# Altium PCB PCB_DataAcq.PcbDoc (part 1 of 2)
Units mm, origin at the board's own origin, x right, y up, seen from the top; angles counter-clockwise.
Board outline 85 x 89.03 mm, 4 copper layers (Top Layer, Top Ground, Bottom Ground, Bottom Layer), stack 1.58 mm thick; 137 components, 89 nets, 495 pads, 1207 vias.
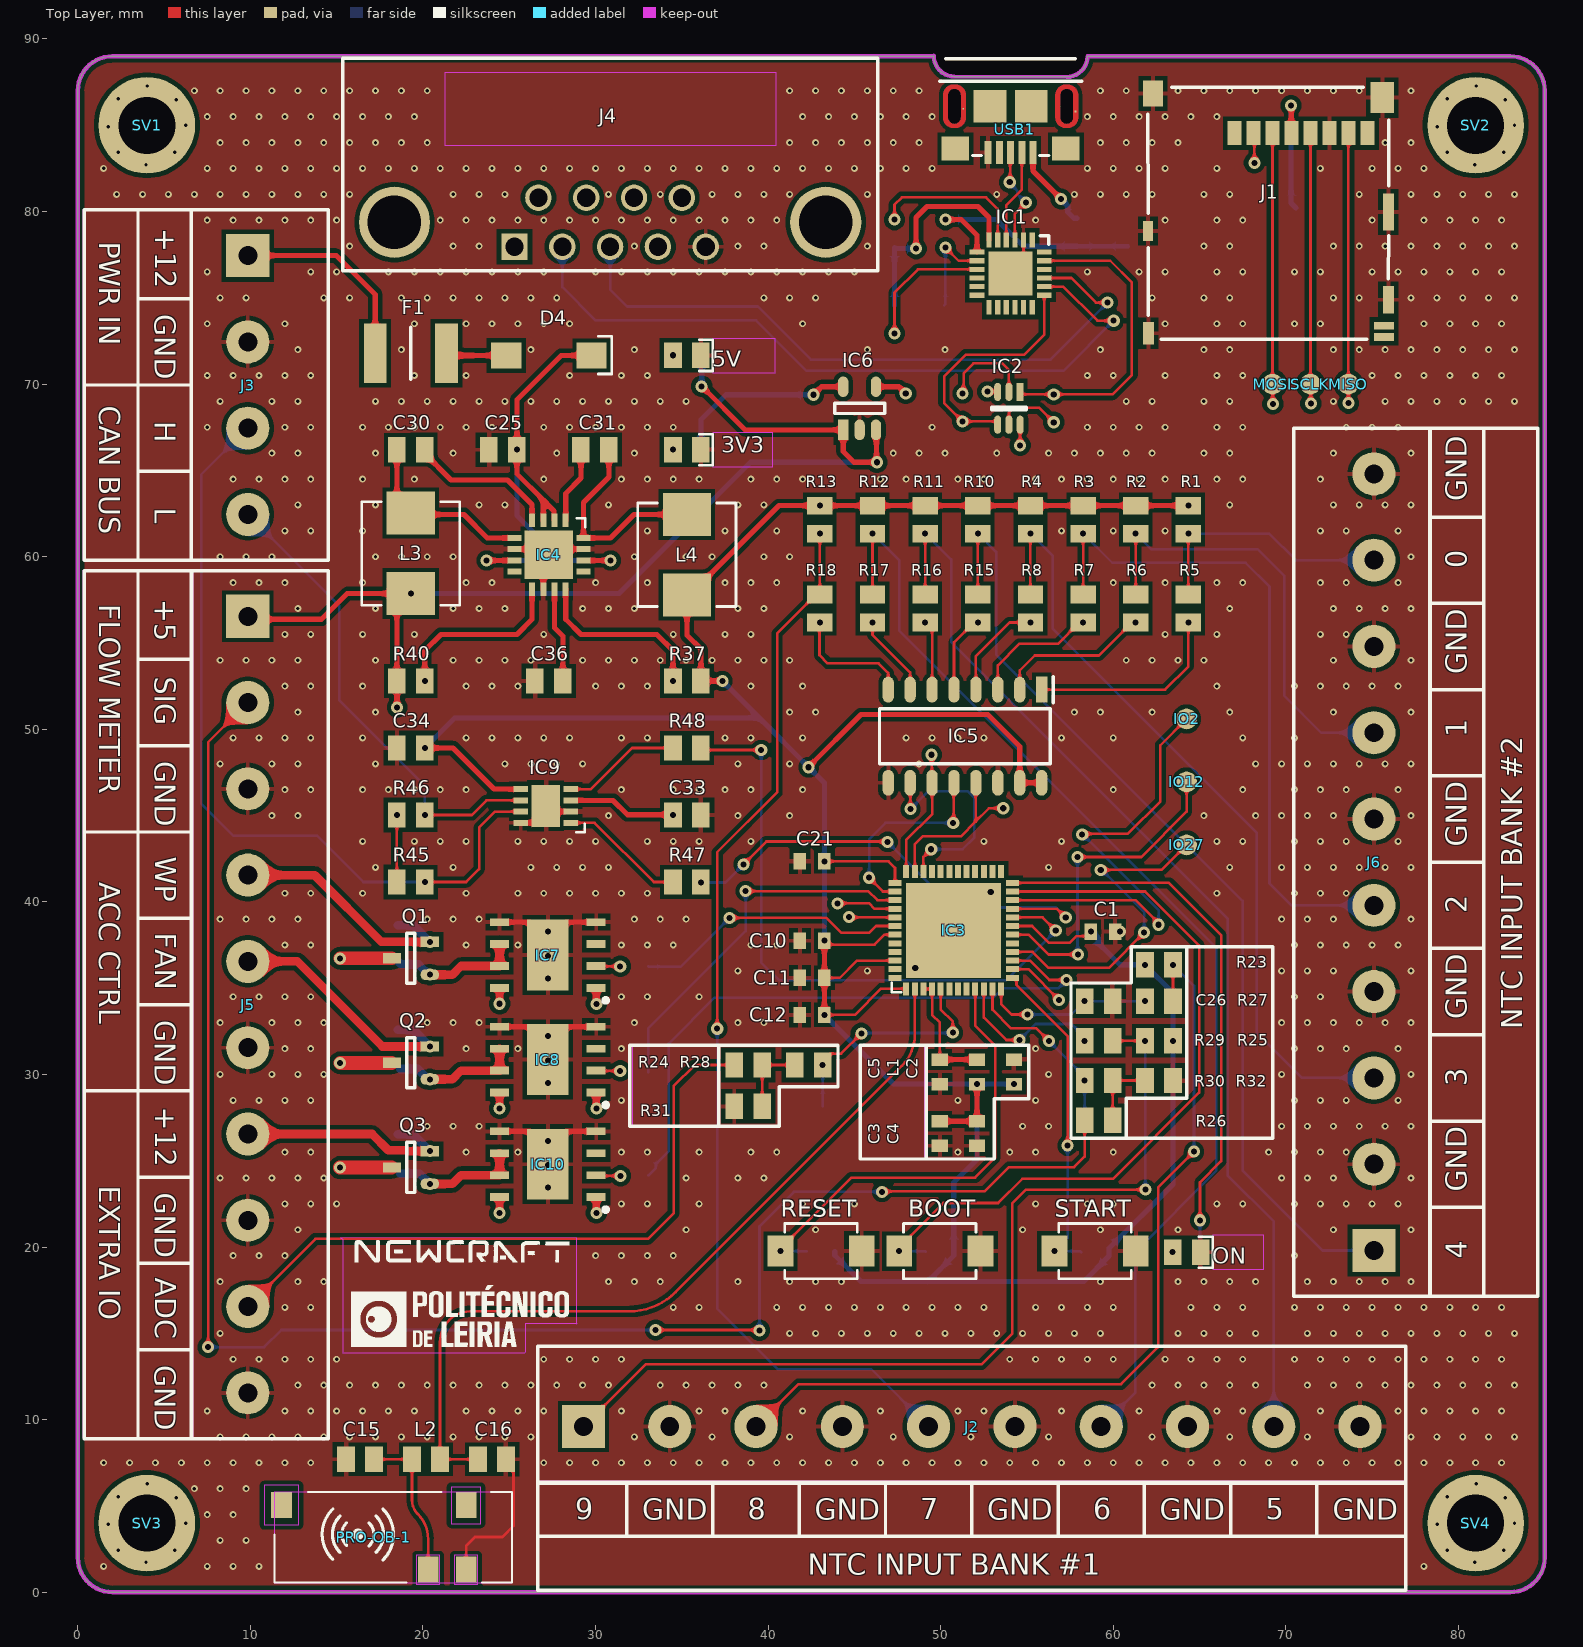
[diagram p0: Top Layer view]
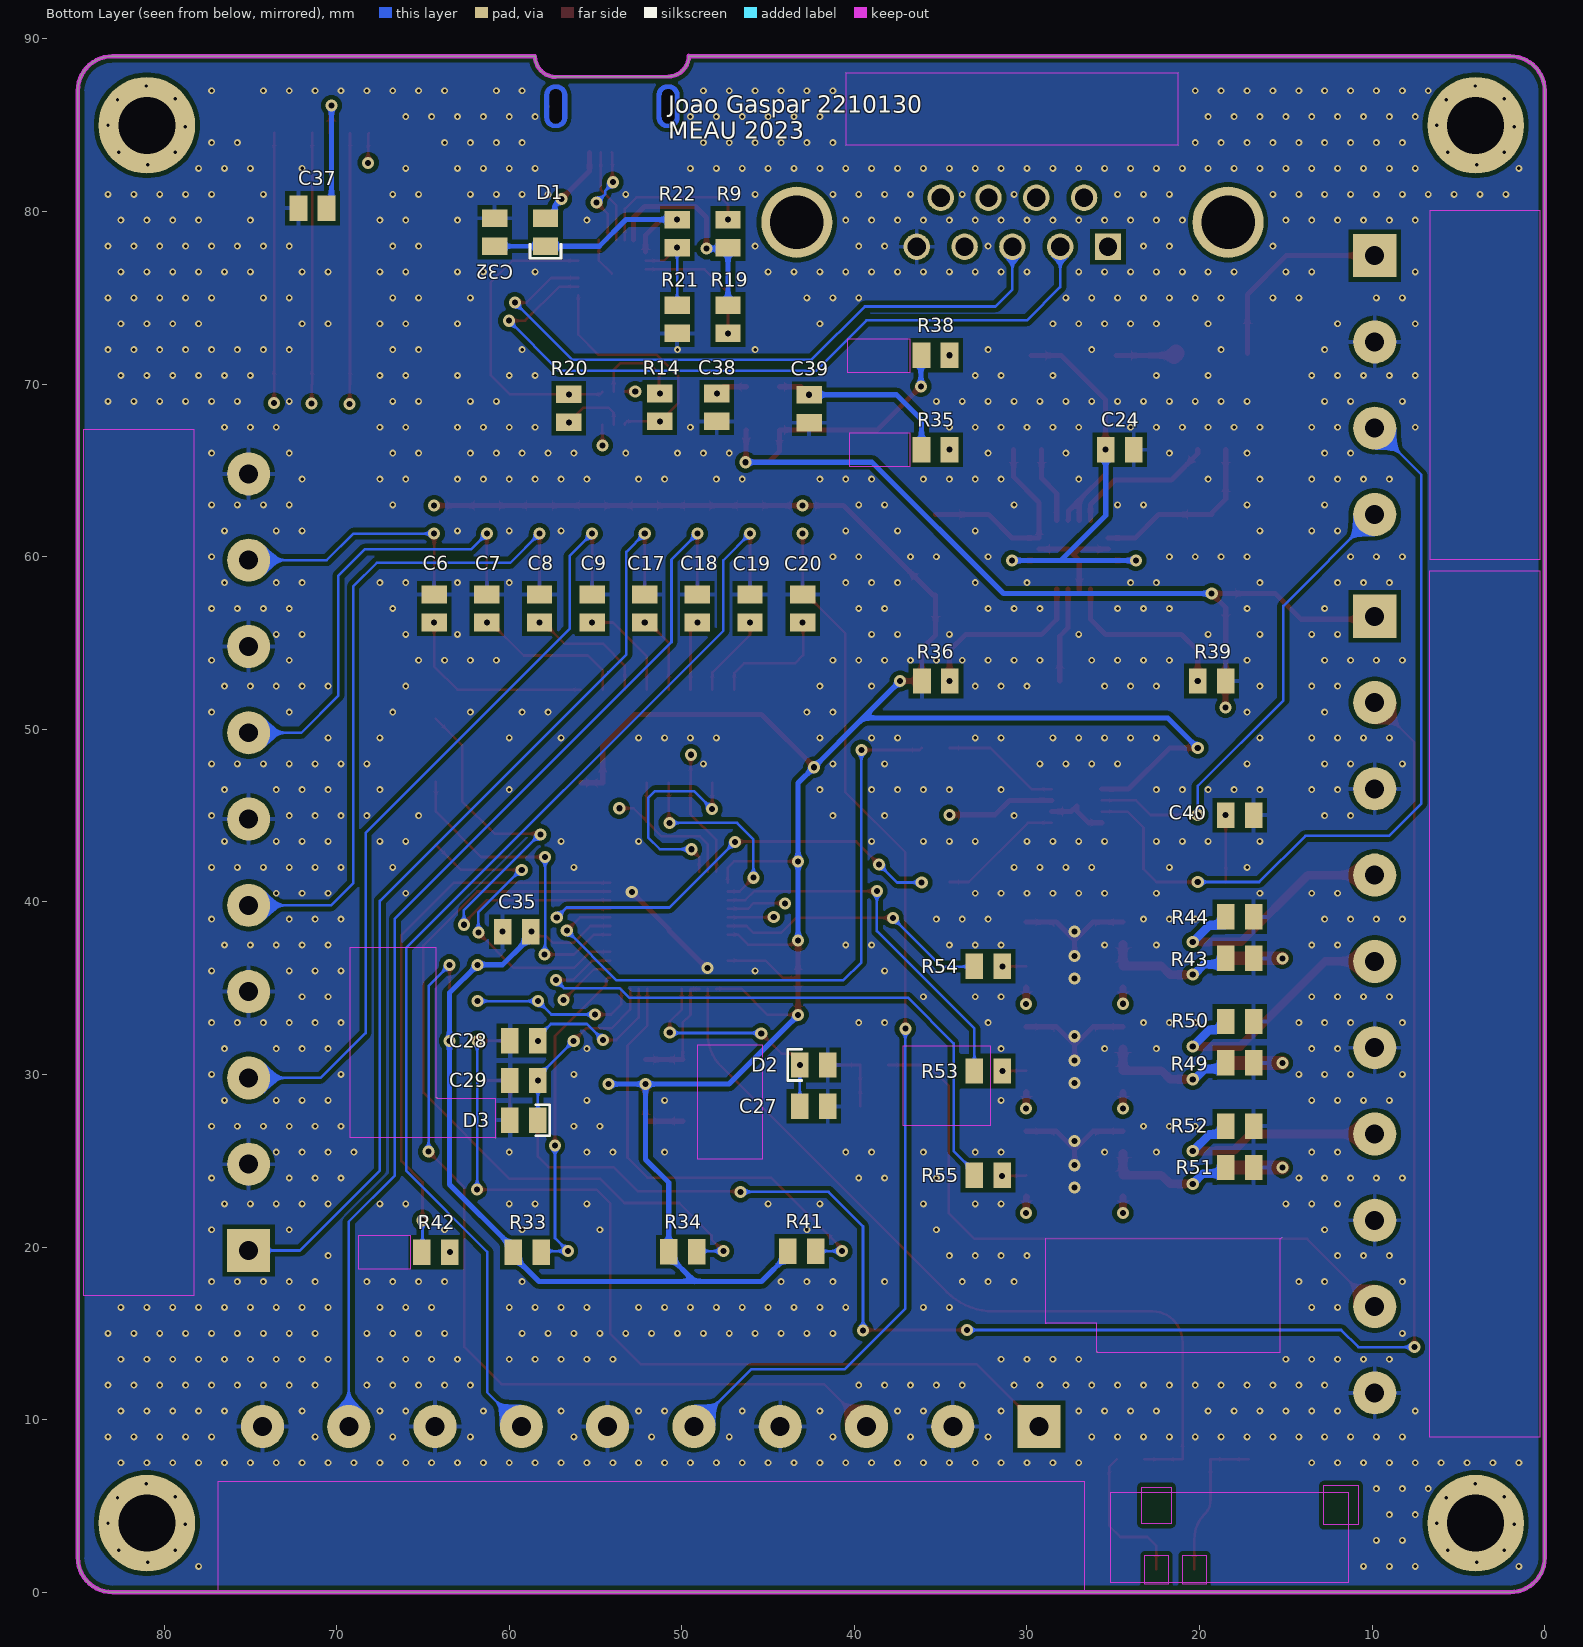
[diagram p1: Bottom Layer view, seen from below]
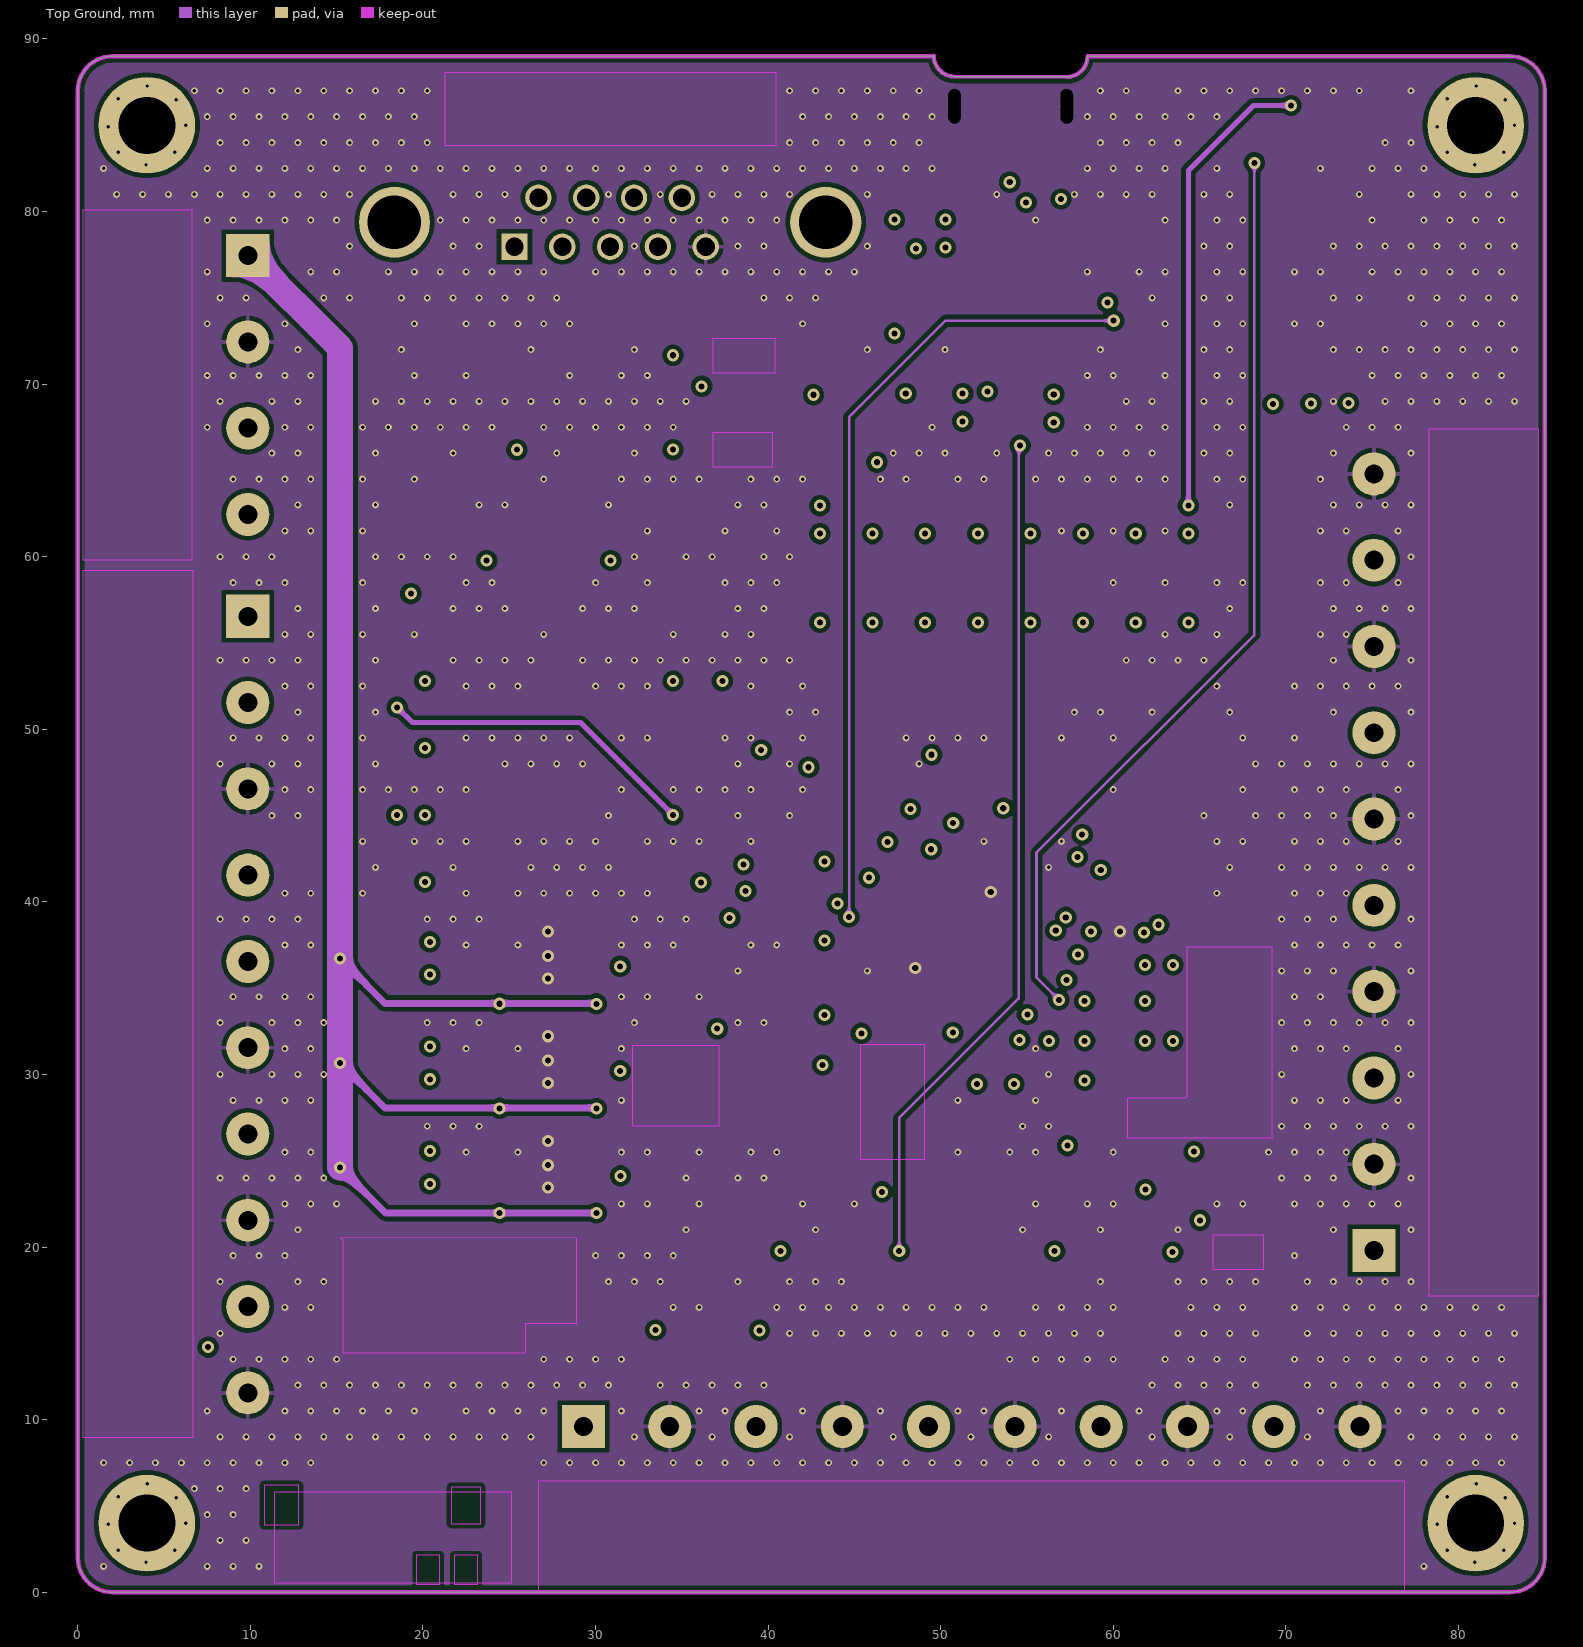
[diagram p2: Top Ground]
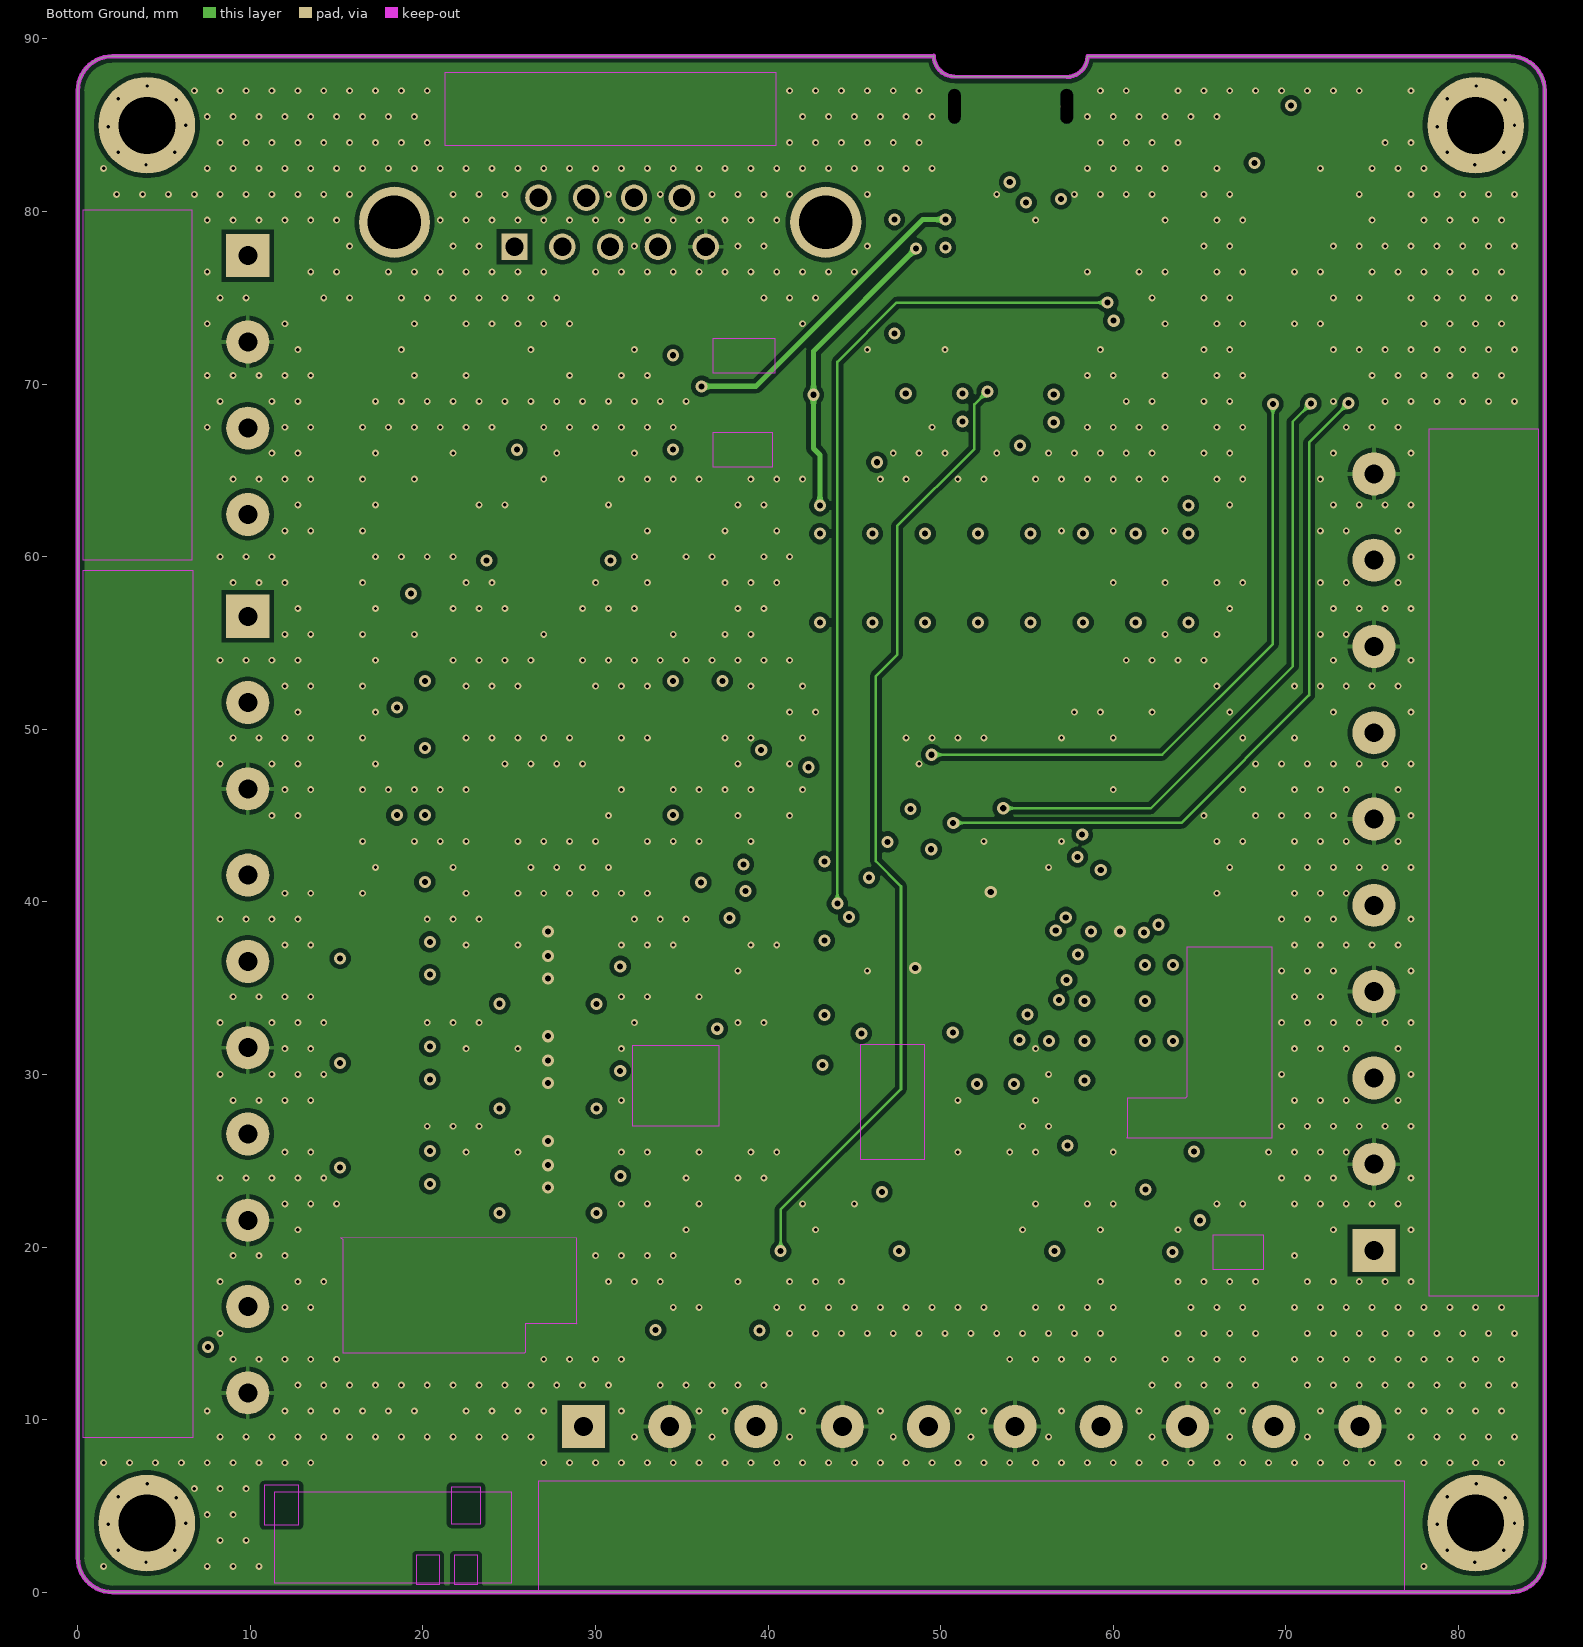
[diagram p3: Bottom Ground]
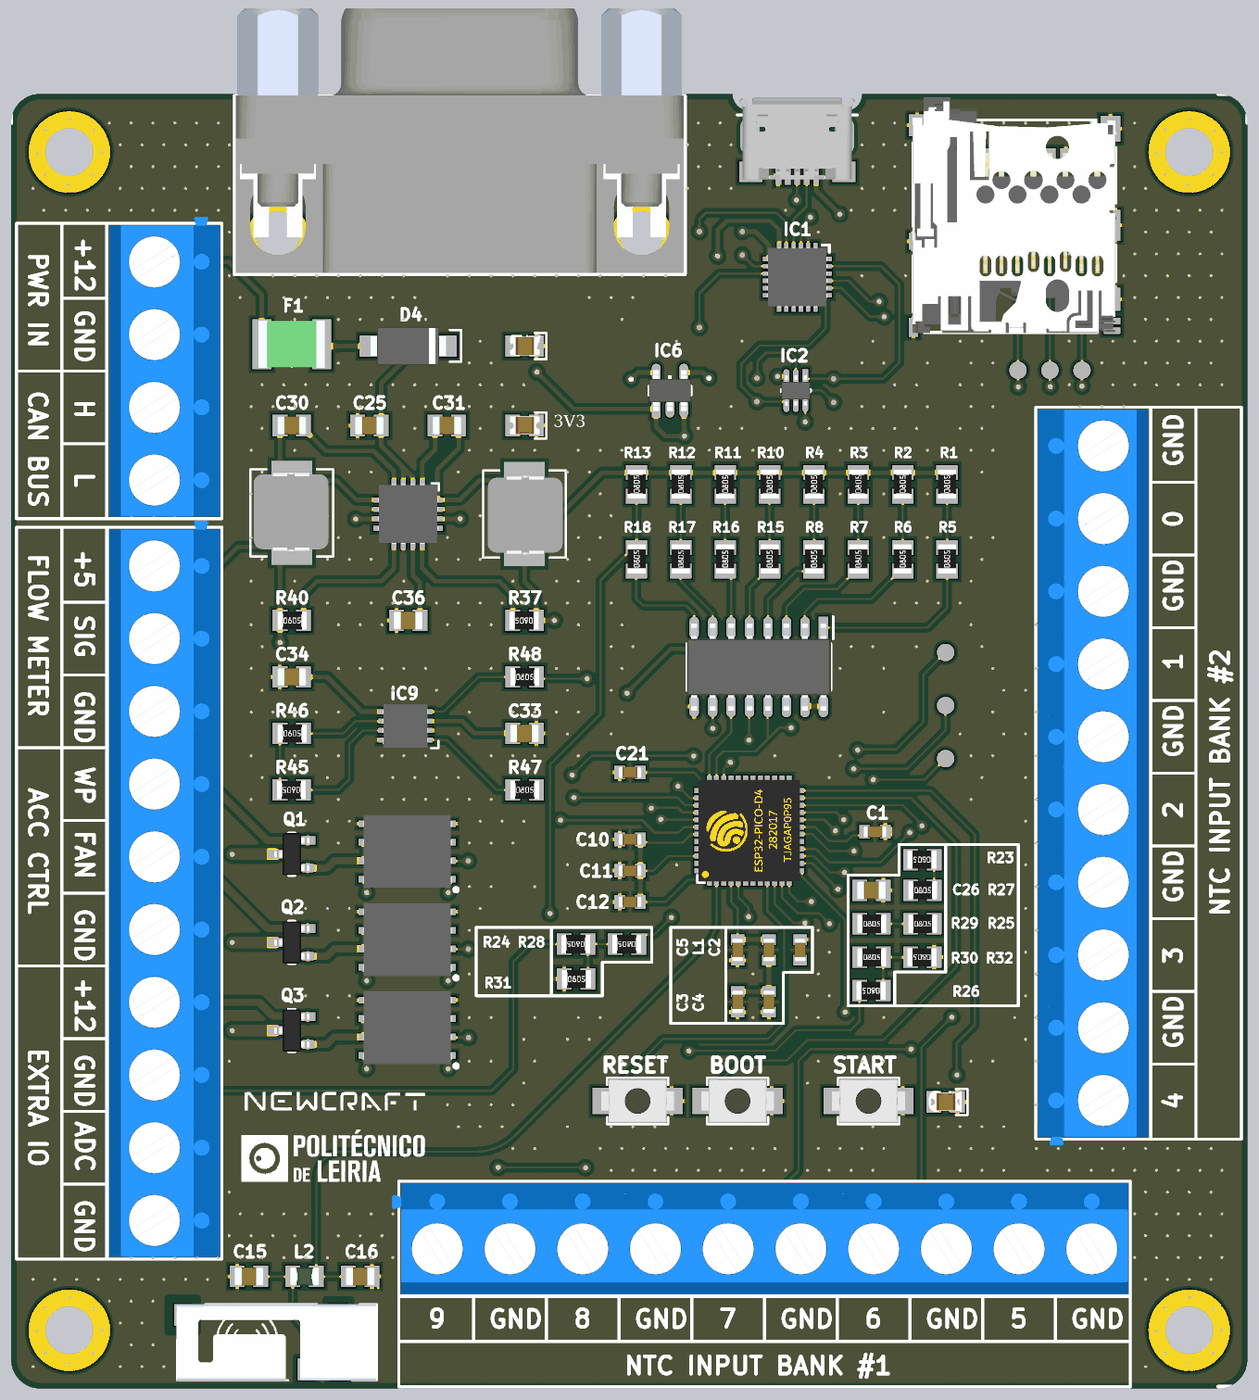
[diagram p5: 3D render of the assembled board from above, using the file's embedded part models]
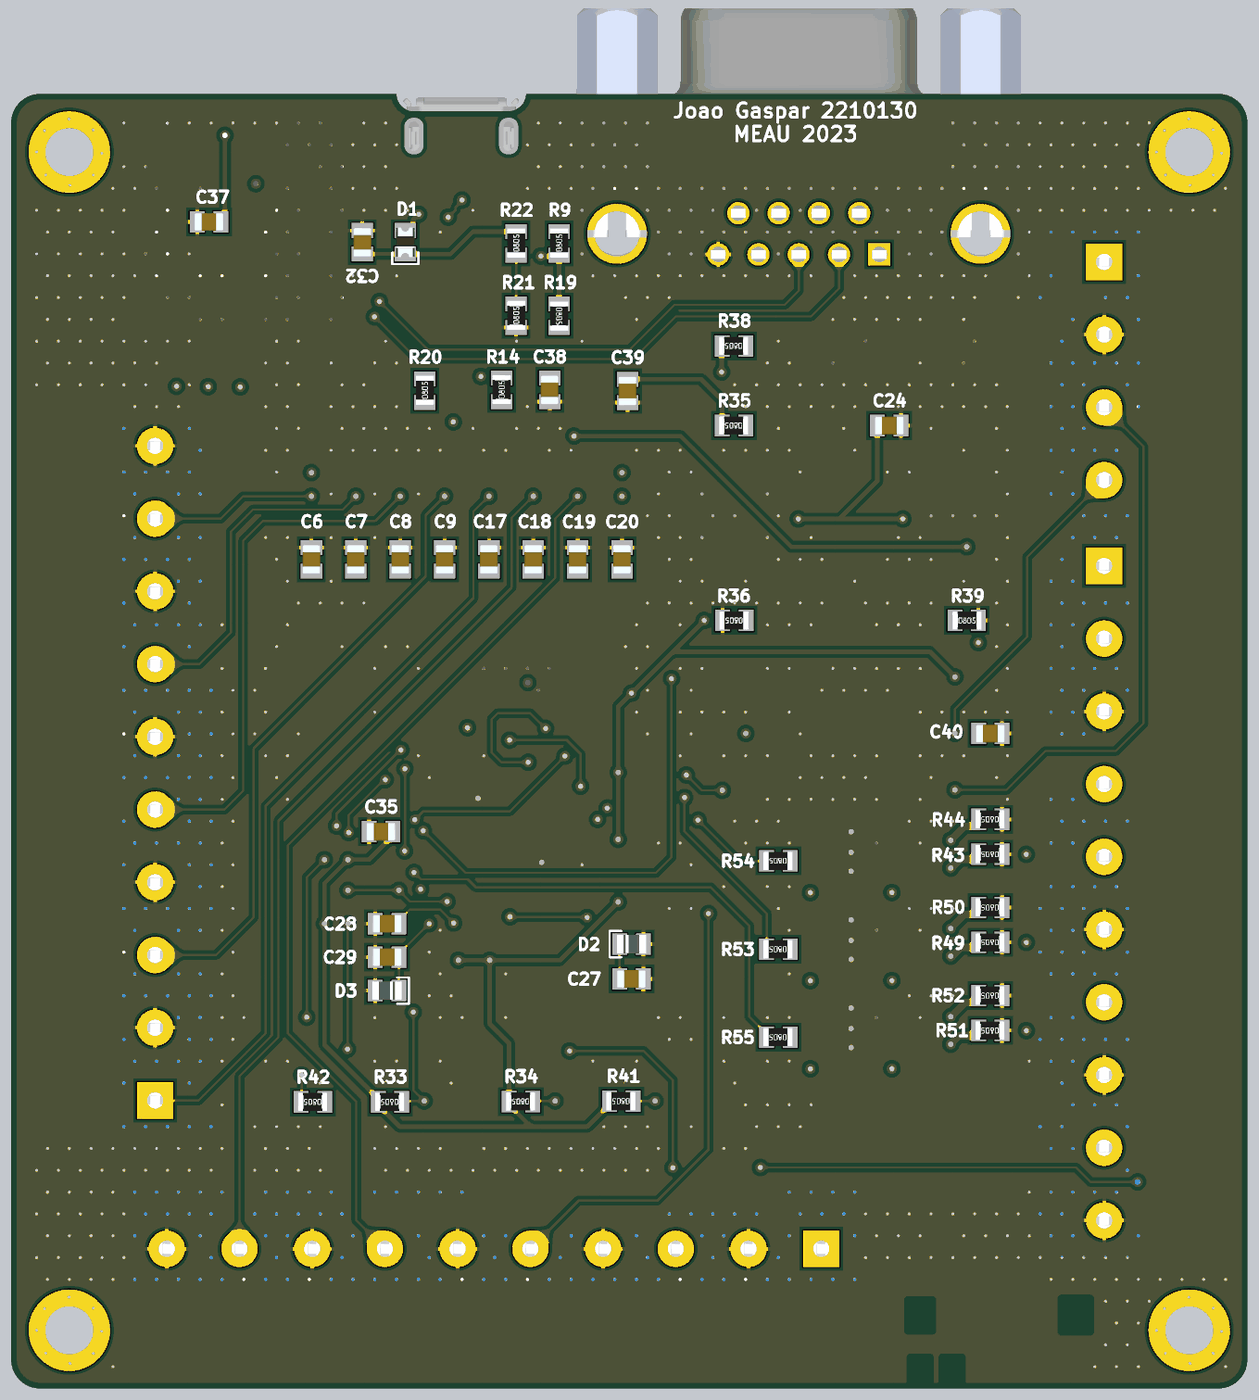
[diagram p6: 3D render of the assembled board from below, using the file's embedded part models]

## Layer stack, top to bottom
Top Solder: solder mask 0.0102, Solder Resist, Dk 3.5
Top Layer: signal copper 0.0356
Dielectric 2: prepreg 0.0711, PP-006, Dk 4.1
Top Ground: signal copper 0.035
Dielectric 1: dielectric 1.2963, FR-4, Dk 4.8
Bottom Ground: signal copper 0.035
Dielectric 3: prepreg 0.0711, PP-006, Dk 4.1
Bottom Layer: signal copper 0.0356
Bottom Solder: solder mask 0.0102, Solder Resist, Dk 3.5

## Board outline
0,2 0,87 cw(c2,87) 2,89 49.595,89 49.595,89.025 ccw(c50.795,89.025) 50.795,87.825 57.305,87.8 ccw(c57.305,89) 58.505,89 83,89 cw(c83,87) 85,87 85,2 cw(c83,2) 83,0 2,0 cw(c2,2)

## Design rules (kind name [scope] priority, off if disabled: settings)
Clearance [All] p1: gap=0.254 ignorepadtopadclearanceinfootprint=FALSE except(0: Arc-Hole Track-Hole SMDPad-Hole THPad-Hole Via-Hole Fill-Hole Poly-Hole Region-Hole Text-Hole)
PolygonConnect [All] p1: thpad.connectstyle=Relief thpad.reliefconductorwidth=0.254 thpad.reliefentries=4 thpad.polygonreliefangle="90 Angle" thpad.airgapwidth=0.254 smdpad.connectstyle=Relief smdpad.reliefconductorwidth=0.254 smdpad.reliefentries=4 smdpad.polygonreliefangle="90 Angle" smdpad.airgapwidth=0.254 via.connectstyle=Direct via.reliefconductorwidth=0.254 via.reliefentries=4 via.polygonreliefangle="90 Angle" via.airgapwidth=0.254
RoutingVias [All] p1: holewidth=0.35 width=0.7 viastyle="Through Hole" minholewidth=0.2 minwidth=0.4 maxholewidth=0.35 maxwidth=0.7
SolderMaskExpansion [All] p1: expansion=0.102 istentingtop=FALSE
Width [All] p1: maxlimit=2 minlimit=0.15 preferedwidth=0.3
30 further rules are at their usual default settings.

## Components (designator, comment, footprint, x,y, rotation, side; value= is the part's Value field where it differs from the comment)
3V3 "150080RS75000" 0805led_V2 35.296,66.203 r0 top
5V "150080RS75000" 0805led_V2 35.296,71.665 r0 top
BOOT "EVP-AWED4A" 0403MM_SWITCH 49.946,19.764 r180 top
C1 "C0603C104Z3VAC7411" 0603_CAP 59.4,38.275 r0 top value=0.1uF
C2 "CL10A106MQ8NNNL" 0603_CAP 54.25,30.15 r90 top value=10uF
C3 "EMK107B7105MA-T" 0603_CAP 49.95,26.58 r270 top value=1uF
C4 "C0603C104Z3VAC7411" 0603_CAP 52.1,26.58 r270 top value=0.1uF
C5 "EMK107B7105MA-T" 0603_CAP 49.95,30.15 r270 top value=NC
C6 "JMK212BBJ226MG8T" 0805CAP_V2 64.35,57 r270 bottom value=1uF
C7 "JMK212BBJ226MG8T" 0805CAP_V2 61.3,57 r270 bottom value=1uF
C8 "JMK212BBJ226MG8T" 0805CAP_V2 58.25,57 r270 bottom value=1uF
C9 "JMK212BBJ226MG8T" 0805CAP_V2 55.2,57 r270 bottom value=1uF
C10 "EMK107B7105MA-T" 0603_CAP 42.55,37.75 r180 top value=1uF
C11 "VJ0603A101JXJCW1BC" 0603_CAP 42.55,35.6 r180 top value=100pF
C12 "CL03A104KP3NNNH" 0603_CAP 42.55,33.45 r180 top value=0.1uF
C15 "0805N2R7C500CT" 0805CAP_V2 16.35,7.7 r180 top value=2.7pF
C16 "0805N4R7C101CT" 0805CAP_V2 24,7.7 r180 top value=4.7pF
C17 "JMK212BBJ226MG8T" 0805CAP_V2 52.15,57 r270 bottom value=1uF
C18 "JMK212BBJ226MG8T" 0805CAP_V2 49.1,57 r270 bottom value=1uF
C19 "JMK212BBJ226MG8T" 0805CAP_V2 46.05,57 r270 bottom value=1uF
C20 "JMK212BBJ226MG8T" 0805CAP_V2 43,57 r270 bottom value=1uF
C21 "C0603C104Z3VAC7411" 0603_CAP 42.55,42.35 r180 top value=0.1uF
C24 "CL21A106KAYNNNG" 0805CAP_V2 24.625,66.2 r180 bottom value=10uF
C25 "CL21A106KAYNNNG" 0805CAP_V2 24.629,66.2 r180 top value=10uF
C26 "JMK212BBJ226MG8T" 0805CAP_V2 59.15,34.25 r180 top value=1uF
C27 "JMK212BBJ226MG8T" 0805CAP_V2 42.352,28.15 r0 bottom value=1uF
C28 "JMK212BBJ226MG8T" 0805CAP_V2 59.15,31.95 r180 bottom value=1uF
C29 "JMK212BBJ226MG8T" 0805CAP_V2 59.15,29.65 r180 bottom value=1uF
C30 "C0805C104M5RACTU" 0805CAP_V2 19.296,66.2 r0 top value=0.1uF
C31 "C0805C104M5RACTU" 0805CAP_V2 29.963,66.2 r0 top value=0.1uF
C32 "JMK212BBJ226MG8T" 0805CAP_V2 60.85,78.8 r270 bottom value=22uF
C33 "JMK212BBJ226MG8T" 0805CAP_V2 35.296,45.033 r180 top value=22uF
C34 "JMK212BBJ226MG8T" 0805CAP_V2 19.296,48.917 r0 top value=22uF
C35 "JMK212BBJ226MG8T" 0805CAP_V2 59.575,38.275 r180 bottom value=22uF
C36 "UMK212B7105KGHT" 0805CAP_V2 27.296,52.8 r0 top value=1uF
C37 "JMK212BBJ226MG8T" 0805CAP_V2 71.4,80.2 r180 bottom value=22uF
C38 "Cap" 0805CAP_V2 47.975,68.65 r90 bottom value=470pF
C39 "Cap" 0805CAP_V2 42.625,68.575 r270 bottom value=2.2uF
C40 "08052C472KAT2A" 0805CAP_V2 17.675,45.025 r0 bottom value=4700pF
D1 "SD0805S020S1R0" 0805DIODE 57.9,78.8 r90 bottom
D2 "BZY55B3V3_RYG" 0805zener_V2 42.352,30.55 r180 bottom
D3 "BZY55B3V3_RYG" 0805zener_V2 59.15,27.35 r0 bottom
D4 "VSSAF5L45HM3_A_H" DO-221_v2 27.298,71.662 r180 top
F1 "0ZCG0200AF2B" FUSC4632X155N 19.296,71.789 r0 top
IC1 "CP2102N-A02-GQFN24" QFN50P400X400X80-25N-D 54.052,76.4 r270 top
IC2 "BC847BDW1T1G" SOT65P210X110-6N 53.952,68.6 r270 top
IC3 "ESP32-PICO-D4" ESP32-PICO-D4_CLEAN_V3 50.75,38.35 r90 top
IC4 "TPS54394RSAR" TPS54394RSAR 27.296,60.114 r270 top
IC5 "MCP3008T-I_SL" SOIC-16 51.405,49.6 r270 top
IC6 "MIC5219-3.3YM5-TR" MIC5219 45.3,68.6 r90 top
IC7 "MCP1407-E_MF" SON127P600X500X100-9N-D 27.238,36.92 r180 top
IC8 "MCP1407-E_MF" SON127P600X500X100-9N-D 27.238,30.86 r180 top
IC9 "TJA1441ATK_0Z" TJA1441ATK_0Z 27.119,45.557 r180 top
IC10 "MCP1407-E_MF" SON127P600X500X100-9N-D 27.238,24.8 r180 top
IO2 "TestPoint" 1_TestPoint 64.25,50.6 r180 top
IO12 "TestPoint" 1_TestPoint 64.25,46.95 r90 top
IO27 "TestPoint" 1_TestPoint 64.25,43.3 r90 top
J1 "2201778-1" SD_11mm_22017781_v2 70.9,79.9 r180 top
J2 "10-08-1101" TERMINAL_10PIN_V3 29.3,9.6 r90 top
J3 "10-08-1041" TERMINAL_4PIN_V3 9.85,77.45 r0 top
J4 "5747844-6" "D-Sub 9 Position" 30.845,79.38 r180 top
J5 "10-08-1101" TERMINAL_10PIN_V3 9.85,56.55 r0 top
J6 "10-08-1101" TERMINAL_10PIN_V3 75.1,19.8 r180 top
L1 "CWF1610-2R2K" 0603_CAP 52.1,30.15 r90 top value=2.2nH
L2 "AIMC-0805-1N5S-T" 0805COIL_V2 20.175,7.7 r0 top value=1.6nH
L3 "IHLP2020BZER4R7M11" "2020 Inductor" 19.296,60.195 r90 top value=4.7uH
L4 "IHLP2020BZER3R3M01" "2020 Inductor" 35.296,60.114 r270 top value=3.3uH
MISO "TestPoint" 1_TestPoint 73.626,70 r90 top
MOSI "TestPoint" 1_TestPoint 69.226,70 r90 top
ON "IN-S85AT5UW" 0805led_V2 64.25,19.7 r0 top
PRO-OB-1 "PRO-OB-440" PRO-OB-440_withKeepout 22.5,1.32 r180 top
Q1 "PMV15UNEAR" TO-263-3 19.296,36.73 r180 top
Q2 "PMV15UNEAR" TO-263-3 19.296,30.67 r180 top
Q3 "PMV15UNEAR" TO-263-3 19.296,24.61 r180 top
R1 "292-10K-RC" 0805RES_V2 64.35,62.15 r90 top value=10k
R2 "292-10K-RC" 0805RES_V2 61.3,62.15 r90 top value=10k
R3 "292-10K-RC" 0805RES_V2 58.25,62.15 r90 top value=10k
R4 "292-10K-RC" 0805RES_V2 55.2,62.15 r90 top value=10k
R5 "292-10K-RC" 0805RES_V2 64.35,57 r90 top value=10k
R6 "292-10K-RC" 0805RES_V2 61.3,57 r90 top value=10k
R7 "292-10K-RC" 0805RES_V2 58.25,57 r90 top value=10k
R8 "292-10K-RC" 0805RES_V2 55.2,57 r90 top value=10k
R9 "Res1" 0805RES_V2 47.325,78.723 r90 bottom value=10k
R10 "292-10K-RC" 0805RES_V2 52.15,62.15 r90 top value=10k
R11 "292-10K-RC" 0805RES_V2 49.1,62.15 r90 top value=10k
R12 "292-10K-RC" 0805RES_V2 46.05,62.15 r90 top value=10k
R13 "292-10K-RC" 0805RES_V2 43,62.15 r90 top value=10k
R14 "Res1" 0805RES_V2 51.275,68.65 r90 bottom value=10k
R15 "292-10K-RC" 0805RES_V2 52.15,57 r90 top value=10k
R16 "292-10K-RC" 0805RES_V2 49.1,57 r90 top value=10k
R17 "292-10K-RC" 0805RES_V2 46.05,57 r90 top value=10k
R18 "292-10K-RC" 0805RES_V2 43,57 r90 top value=10k
R19 "Res1" 0805RES_V2 47.325,73.75 r270 bottom value=10k
R20 "Res1" 0805RES_V2 56.55,68.6 r90 bottom value=10k
R21 "Res1" 0805RES_V2 50.275,73.75 r90 bottom value=47.5k
R22 "Res1" 0805RES_V2 50.275,78.723 r90 bottom value=22.1k
R23 "292-10K-RC" 0805RES_V2 62.65,36.35 r180 top value=10k
R24 "292-10K-RC" 0805RES_V2 38.85,30.55 r180 top value=10k
R25 "292-10K-RC" 0805RES_V2 62.65,31.95 r0 top value=10k
R26 "292-10K-RC" 0805RES_V2 59.15,27.35 r180 top value=10k
R27 "292-10K-RC" 0805RES_V2 62.65,34.25 r0 top value=10k
R28 "292-10K-RC" 0805RES_V2 42.35,30.55 r180 top value=10k
R29 "292-10K-RC" 0805RES_V2 59.15,31.95 r0 top value=10k
R30 "292-10K-RC" 0805RES_V2 59.15,29.65 r0 top value=10k
R31 "ERJ-6ENF2211V" 0805RES_V2 38.85,28.15 r0 top value=2.21k
R32 "ERJ-6ENF2211V" 0805RES_V2 62.65,29.65 r180 top value=2.21k
R33 "Res1" 0805RES_V2 58.95,19.7 r0 bottom value=10K
R34 "Res1" 0805RES_V2 49.95,19.725 r0 bottom value=10K
R35 "1623131-1" 0805RES_V2 35.3,66.2 r0 bottom value=1k
R36 "ERJ-6ENF2212V" 0805RES_V2 35.275,52.8 r0 bottom value=22.1k
R37 "ERJ-6ENF7322V" 0805RES_V2 35.296,52.8 r180 top value=73.2k
R38 "1623131-1" 0805RES_V2 35.3,71.675 r0 bottom value=1k
R39 "ERJ-6ENF2212V" 0805RES_V2 19.3,52.8 r180 bottom value=22.1k
R40 "CR0805-FX-1243ELF" 0805RES_V2 19.296,52.8 r0 top value=124k
R41 "Res1" 0805RES_V2 43.05,19.75 r0 bottom value=10K
R42 "1623131-1" 0805RES_V2 64.25,19.7 r0 bottom value=1k
R43 "NC" 0805RES_V2 17.675,36.73 r0 bottom
R44 "Res1" 0805RES_V2 17.675,39.128 r0 bottom value=10K
R45 "RK73H2ATTD60R4F" 0805RES_V2 19.296,41.15 r180 top value=60R
R46 "RK73H2ATTD60R4F" 0805RES_V2 19.296,45.033 r0 top value=60R
R47 "WR08X000PGL" 0805RES_V2 35.296,41.15 r0 top value=0
R48 "WR08X000PGL" 0805RES_V2 35.296,48.917 r0 top value=0
R49 "NC" 0805RES_V2 17.675,30.67 r0 bottom
R50 "Res1" 0805RES_V2 17.675,33.068 r0 bottom value=10K
R51 "NC" 0805RES_V2 17.675,24.61 r0 bottom
R52 "Res1" 0805RES_V2 17.675,27.008 r0 bottom value=10K
R53 "Res1" 0805RES_V2 32.25,30.2 r0 bottom value=10K
R54 "Res1" 0805RES_V2 32.25,36.275 r0 bottom value=10K
R55 "Res1" 0805RES_V2 32.25,24.15 r0 bottom value=10K
RESET "EVP-AWED4A" 0403MM_SWITCH 43.073,19.764 r180 top
SCLK "TestPoint" 1_TestPoint 71.426,70 r90 top
START "EVP-AWED4A" 0403MM_SWITCH 58.95,19.764 r180 top
SV1 "Support Via" My_Via_Hole_v2 4,85 r0 top locked
SV2 "Support Via" My_Via_Hole_v2 81,85 r0 top locked
SV3 "Support Via" My_Via_Hole_v2 4,4 r0 top locked
SV4 "Support Via" My_Via_Hole_v2 81,4 r0 top locked
USB1 "2013499-1" TE_2013499-1 54.05,83.425 r180 top

## Footprints (in the part's own frame and the unit in brackets; to place one, negate y for a bottom-side part, rotate by r counter-clockwise, add the part's x,y. Pads: shape width x height; smd on the part's side, far side on the other; paste and mask are expansions set on the pad)
1_TestPoint [mm]
  round 1.2 smd: 1(0,0)
0403MM_SWITCH [mm]
  rect 1.5x1.8 smd: 1(-2.35,0) 2(2.35,0)
  silkscreen extent -2.1,-1.6 2.1,1.6, body extent -2.5,-1.5 2.5,1.5, height 1.93
0603_CAP [mm]
  rect 0.73x0.94 smd: 1(-0.71,0) 2(0.71,0)
  body extent -0.8,-0.4 0.8,0.4, height 0.9
0805CAP_V2 [mm]
  rect 1.02x1.47 smd: 1(-0.81,0) 2(0.81,0)
  body extent -1,-0.63 1,0.63, height 0.94
0805COIL_V2 [mm]
  rect 1.02x1.47 smd: 1(-0.81,0) 2(0.81,0)
  body extent -1,-0.63 1,0.63, height 0.61
0805DIODE [mm]
  rect 1.02x1.47 smd: 1(-0.81,0) 2(0.81,0)
  silkscreen extent -1.5,-0.9 -0.7,0.9, body extent -1.01,-0.65 1.01,0.65, height 0.8
0805led_V2 [mm]
  rect 1.02x1.47 smd: 1(-0.81,0) 2(0.81,0)
  silkscreen extent 0.7,-0.9 1.5,0.9, body extent -0.98,-0.63 1.04,0.63, height 0.8
0805RES_V2 [mm]
  rect 1.02x1.47 smd: 1(-0.81,0) 2(0.81,0)
  body extent -0.97,-0.63 1.03,0.63, height 0.52
0805zener_V2 [mm]
  rect 1.02x1.47 smd: 1(-0.81,0) 2(0.81,0)
  silkscreen extent -1.5,-0.9 -0.7,0.9, body extent -1,-0.63 1,0.63, height 0.85
"2020 Inductor" [mil]
  rect 97.68x110 smd paste+0 mask+0: 1(-91.81,0) 2(91.81,0)
  silkscreen extent -118,-112 118,112, body extent -104,-99 110,103, height 114
"D-Sub 9 Position" [mm]
  rect 1.53x1.53 hole 1.05: 1(5.54,1.42)
  round 1.53 hole 1.05: 2(2.77,1.42) 3(0,1.42) 4(-2.77,1.42) 5(-5.54,1.42) 6(4.155,-1.42) 7(1.385,-1.42) 8(-1.385,-1.42) 9(-4.155,-1.42)
  round 4.116 hole 3.1: NC(-12.495,0) NC(12.495,0)
  silkscreen extent -15.51,-9.5 15.51,2.8, body extent -15.41,-15.5 15.4,2.7, height 12.8
DO-221_v2 [mm]
  rect 1.75x1.49 smd: 1(-2.475,0) 2(2.475,0)
  silkscreen extent -3.65,-1.11 -2.86,1.07, body extent -2.6,-1.3 2.6,1.3, height 1
ESP32-PICO-D4_CLEAN_V3 [mm]
  rect 0.75x0.35 smd: 1(-3.4,2.75) 2(-3.4,2.25) 3(-3.4,1.75) 4(-3.4,1.25) 5(-3.4,0.75) 6(-3.4,0.25) 7(-3.4,-0.25) 8(-3.4,-0.75) 9(-3.4,-1.25) 10(-3.4,-1.75) 11(-3.4,-2.25) 12(-3.4,-2.75) 25(3.4,-2.75) 26(3.4,-2.25) 27(3.4,-1.75) 28(3.4,-1.25) 29(3.4,-0.75) 30(3.4,-0.25) 31(3.4,0.25) 32(3.4,0.75) 33(3.4,1.25) 34(3.4,1.75) 35(3.4,2.25) 36(3.4,2.75)
  rect 0.35x0.75 smd: 13(-2.75,-3.4) 14(-2.25,-3.4) 15(-1.75,-3.4) 16(-1.25,-3.4) 17(-0.75,-3.4) 18(-0.25,-3.4) 19(0.25,-3.4) 20(0.75,-3.4) 21(1.25,-3.4) 22(1.75,-3.4) 23(2.25,-3.4) 24(2.75,-3.4) 37(2.75,3.4) 38(2.25,3.4) 39(1.75,3.4) 40(1.25,3.4) 41(0.75,3.4) 42(0.25,3.4) 43(-0.25,3.4) 44(-0.75,3.4) 45(-1.25,3.4) 46(-1.75,3.4) 47(-2.25,3.4) 48(-2.75,3.4)
  rect 5.5x5.5 smd: 49(-0.006,0.013)
  silkscreen extent -3.57,3.05 -3.05,3.57, body extent -3.5,-3.5 3.5,3.5, height 1.09
FUSC4632X155N [mm]
  rect 1.31x3.43 smd: 1(-2.065,0) 2(2.065,0)
  silkscreen extent 0,-1.52 0,1.52, body extent -2.27,-1.62 2.27,1.62, height 1.55
MIC5219 [mm]
  rect 1.2x0.6 smd: 1(-1.25,0.95)
  oval 1.2x0.6 smd: 2(-1.25,0) 3(-1.25,-0.95) 4(1.25,-0.95) 5(1.25,0.95)
  silkscreen extent -0.3,-1.45 0.3,1.45, body extent -1.4,-1.45 1.4,1.45, height 1.2
My_Via_Hole_v2 [mm]
  round 5.6 hole 3.3: 1(0,0)
  round 0.7 hole 0.2: 2(-2.225,-0.075) 2(-1.65,-1.575) 2(-1.65,1.525) 2(-0.05,-2.275) 2(0.025,2.275) 2(1.625,-1.575) 2(1.7,1.475) 2(2.25,0)
PRO-OB-440_withKeepout [mm]
  rect 1.2x1.5 smd: 1(0,0) 2(2.2,0) 3(0,-3.73) 4(10.7,-3.73)
  Keep-Out Layer region: 11.7,-2.574 9.7,-2.574 9.7,-4.874 11.7,-4.874
  Keep-Out Layer region: 0.675,0.868 -0.675,0.868 -0.675,-0.825 0.675,-0.825
  Keep-Out Layer region: 2.875,0.868 1.525,0.868 1.525,-0.825 2.875,-0.825
  Keep-Out Layer region: 11.125,0.776 -2.65,0.776 -2.65,-4.474 11.125,-4.474
  Keep-Out Layer region: 0.85,-2.649 -0.85,-2.649 -0.85,-4.774 0.85,-4.774
  silkscreen extent -2.65,-4.48 11.1,0.75, body extent -2.63,-4.46 11.12,0.77, height 3.5
QFN50P400X400X80-25N-D [mm]
  rect 0.85x0.3 smd: 1(-1.95,1.25) 2(-1.95,0.75) 3(-1.95,0.25) 4(-1.95,-0.25) 5(-1.95,-0.75) 6(-1.95,-1.25) 13(1.95,-1.25) 14(1.95,-0.75) 15(1.95,-0.25) 16(1.95,0.25) 17(1.95,0.75) 18(1.95,1.25)
  rect 0.3x0.85 smd: 7(-1.25,-1.95) 8(-0.75,-1.95) 9(-0.25,-1.95) 10(0.25,-1.95) 11(0.75,-1.95) 12(1.25,-1.95) 19(1.25,1.95) 20(0.75,1.95) 21(0.25,1.95) 22(-0.25,1.95) 23(-0.75,1.95) 24(-1.25,1.95)
  rect 2.55x2.55 smd: 25(0,0)
  body extent -2.05,-2.05 2.05,2.05, height 0.8
SD_11mm_22017781_v2 [mm]
  rect 0.8x1.4 smd: 1(3.875,-4.65) 2(2.774,-4.65) 3(1.674,-4.65) 4(0.574,-4.65) 5(-0.526,-4.65) 6(-1.626,-4.65) 7(-2.726,-4.65) 8(-3.826,-4.65)
  rect 1.15x0.45 smd: 9(-4.791,7.175) 10(-4.791,6.515)
  rect 1.35x1.8 smd: 11(-4.69,-6.7)
  rect 0.65x2.14 smd: 12(-5.041,-0.07)
  rect 0.65x1.6 smd: 13(-5.041,5.01)
  rect 0.65x1.3 smd: 14(8.86,6.95)
  rect 0.6x1.15 smd: 15(8.885,1.025)
  rect 1.16x1.5 smd: 16(8.604,-6.95)
  silkscreen extent -5.06,-7.3 8.89,7.3, body extent -5.11,-8.87 8.92,7.33, height 1.8
SOIC-16 [mm]
  rect 1.5x0.65 smd: 1(-2.7,4.445)
  oval 1.5x0.65 smd: 2(-2.7,3.175) 3(-2.7,1.905) 4(-2.7,0.635) 5(-2.7,-0.635) 6(-2.7,-1.905) 7(-2.7,-3.175) 8(-2.7,-4.445) 9(2.7,-4.445) 10(2.7,-3.175) 11(2.7,-1.905) 12(2.7,-0.635) 13(2.7,0.635) 14(2.7,1.905) 15(2.7,3.175) 16(2.7,4.445)
  silkscreen extent -3.45,-4.95 1.6,5.12, body extent -3,-4.95 3,4.95, height 1.75
SON127P600X500X100-9N-D [mm]
  rect 1.1x0.45 smd: 1(-2.8,1.905) 2(-2.8,0.635) 3(-2.8,-0.635) 4(-2.8,-1.905) 5(2.8,-1.905) 6(2.8,-0.635) 7(2.8,0.635) 8(2.8,1.905)
  rect 2.4x4.1 smd: 9(0,0)
  silkscreen extent -3.48,2.51 -3.23,2.75, body extent -3.05,-2.5 3.05,2.5, height 1
SOT65P210X110-6N [mm]
  rect 1.05x0.4 smd: 1(-0.95,0.65)
  oval 1.05x0.4 smd: 2(-0.95,0) 3(-0.95,-0.65) 4(0.95,-0.65) 5(0.95,0) 6(0.95,0.65)
  silkscreen extent -0.08,-1 0.08,1, body extent -1.05,-1 1.05,1, height 1.1
TE_2013499-1 [mm]
  rect 0.4x1.35 smd: 1(-1.3,0) 2(-0.65,0) 3(0,0) 4(0.65,0) 5(1.3,0)
  rect 1.6x1.4 smd: 6(3.2,-0.225) 7(-3.2,-0.225)
  rect 1.9x1.9 smd: 8(-1.2,-2.675) 9(1.2,-2.675)
  rect 0.1x0.1 smd paste-1 mask+0: 10(-3.76,-2.37) 11(2.75,-2.53)
  round 0.71 hole 0.71 slot 2 at 90 deg unplated: ""(-3.255,-2.675) ""(3.255,-2.675)
  Top Layer region: 126 vertices and 1 holes, not listed, extent 2.6,-3.928 3.91,-1.425
  Top Layer region: 126 vertices and 1 holes, not listed, extent -3.91,-3.928 -2.6,-1.425
  Bottom Layer region: 126 vertices and 1 holes, not listed, extent 2.6,-3.928 3.91,-1.425
  Bottom Layer region: 126 vertices and 1 holes, not listed, extent -3.91,-3.928 -2.6,-1.425
  silkscreen extent -4.13,-5.43 4.12,0.18, body extent -4,-5.3 4,0.3, height 2.77
TERMINAL_4PIN_V3 [mm]
  rect 2.5x2.5 hole 1.1: 1(0,0)
  round 2.5 hole 1.1: 2(0,-5) 3(0,-10) 4(0,-15)
  silkscreen extent -9.49,-17.65 4.65,2.65, body extent -3.1,-17.5 4.5,3.1, height 10
TERMINAL_10PIN_V3 [mm]
  rect 2.5x2.5 hole 1.1: 1(0,0)
  round 2.5 hole 1.1: 2(0,-5) 3(0,-10) 4(0,-15) 5(0,-20) 6(0,-25) 7(0,-30) 8(0,-35) 9(0,-40) 10(0,-45)
  silkscreen extent -9.49,-47.65 4.65,2.65, body extent -3.1,-47.5 4.5,3.1, height 10
TJA1441ATK_0Z [mm]
  rect 0.85x0.35 smd: 1(-1.45,0.975) 2(-1.45,0.325) 3(-1.45,-0.325) 4(-1.45,-0.975) 5(1.45,-0.975) 6(1.45,-0.325) 7(1.45,0.325) 8(1.45,0.975)
  rect 1.65x2.45 smd: 9(0,0)
  silkscreen extent -2.26,1.03 -1.76,1.53, body extent -1.55,-1.5 1.55,1.5, height 1
TO-263-3 [mm]
  rrect80% 1.05x0.6 smd: 1(-1.1,0.95)
  rect 1.05x0.6 smd: 2(-1.1,-0.95) 3(1.1,0)
  silkscreen extent -0.23,-1.45 0.23,1.45, body extent -1.2,-1.45 1.2,1.45, height 0.95
TPS54394RSAR [mm]
  rect 0.8x0.35 smd: 1(-2,0.975) 2(-2,0.325) 3(-2,-0.325) 4(-2,-0.975) 9(2,-0.975) 10(2,-0.325) 11(2,0.325) 12(2,0.975)
  rect 0.35x0.8 smd: 5(-0.975,-2) 6(-0.325,-2) 7(0.325,-2) 8(0.975,-2) 13(0.975,2) 14(0.325,2) 15(-0.325,2) 16(-0.975,2)
  rect 2.8x2.8 smd: 17(0,0)
  silkscreen extent -2.11,1.61 -1.61,2.11, body extent -2.05,-2.05 2.05,2.05, height 1

## Part data
3V3 5V ON: library part LED0, "Typical INFRARED GaAs LED", LatestRevisionDate=08-Jul-2005, LatestRevisionNote="Mech Layer 1 removed.", PackageDescription="LED; 2 Leads", PackageReference=LED-0, Published=8-Jun-2000, Publisher="Altium Limited"
BOOT RESET START: library part SW-SPST, "Single-Pole, Single-Throw Switch", LatestRevisionDate=17-Jul-2002, LatestRevisionNote="Re-released for DXP Platform.", PackageDescription="Switch; 2 Leads", PackageReference=SPST-2, Published=24-Mar-1999, Publisher="Altium Limited"
C1 C2 C3 C4 C5 C6 C7 C8 C9 C10 C11 C12 C15 C16 C17 C18 C19 C20 C21 C24 C25 C26 C27 C28 C29 C30 C31 C32 C33 C34 C35 C36 C37 C40: library part Cap, "Capacitor", LatestRevisionDate=17-Jul-2002, LatestRevisionNote="Re-released for DXP Platform.", PackageDescription="Radial Cap, Thru-Hole; 2 Leads; 0.3 in Pin Spacing", PackageReference=RAD-0.3, Published=8-Jun-2000, Publisher="Altium Limited"
C38 C39: "Capacitor", LatestRevisionDate=17-Jul-2002, LatestRevisionNote="Re-released for DXP Platform.", PackageDescription="Radial Cap, Thru-Hole; 2 Leads; 0.3 in Pin Spacing", PackageReference=RAD-0.3, Published=8-Jun-2000, Publisher="Altium Limited"
D1: "Schottky Diode", Manufacturer_Name=AVX, Mouser Part Number=581-SD0805S020S1R0, Arrow Part Number=SD0805S020S1R0, Arrow Price/Stock=https://www.arrow.com/en/products/sd0805s020s1r0/avx?region=nac, Datasheet Link=https://componentsearchengine.com/Datasheets/1/SD0805S020S1R0.pdf, Height=1mm, Manufacturer_Part_Number=SD0805S020S1R0, Mouser Price/Stock=https://www.mouser.co.uk/ProductDetail/AVX-Kyocera/SD0805S020S1R0?qs=jCA%252BPfw4LHbpkAoSnwrdjw%3D%3D
D2 D3: library part BZY55B3V3_RBG, "Diode", Manufacturer_Name="Taiwan Semiconductor", Manufacturer_Part_Number="BZY55B3V3 RBG", Mouser Part Number=821-BZY55B3V3RBG, Datasheet Link="https://componentsearchengine.com/Datasheets/1/BZY55B3V3 RBG.pdf", Height=0.85mm, Mouser Price/Stock=https://www.mouser.co.uk/ProductDetail/Taiwan-Semiconductor/BZY55B3V3-RBG?qs=mAH9sUMRCtvrJdI%2FtfeTug%3D%3D
D4: "Schottky Diode", Manufacturer_Name=Vishay, Manufacturer_Part_Number=VSSAF5L45HM3_A/H, Mouser Part Number=78-VSSAF5L45HM3_A/H, Datasheet Link=https://www.vishay.com/docs/89934/vssaf5l45.pdf, Height=1mm, Mouser Price/Stock=https://www.mouser.co.uk/ProductDetail/Vishay-General-Semiconductor/VSSAF5L45HM3_A-H?qs=Vcr9%2FL0R50j9URAPL4oknQ%3D%3D
F1: "Fuse", Manufacturer_Name=Bel, Mouser Part Number=530-0ZCG0200AF2B, Datasheet Link=https://belfuse.com/resources/datasheets/circuitprotection/ds-cp-0zcg-series.pdf, Height=1.55mm, Manufacturer_Part_Number=0ZCG0200AF2B
IC1: library part CP2102N-A02-GQFN24R, "Integrated Circuit", Manufacturer_Name="Silicon Labs", Mouser Part Number=634-CP2102NA02QFN24R, Arrow Part Number=CP2102N-A02-GQFN24R, Arrow Price/Stock=https://www.arrow.com/en/products/cp2102n-a02-gqfn24r/silicon-labs, Datasheet Link=https://www.silabs.com/documents/public/data-sheets/cp2102n-datasheet.pdf, Height=0.8mm, Manufacturer_Part_Number=CP2102N-A02-GQFN24R, Mouser Price/Stock=https://www.mouser.co.uk/ProductDetail/Silicon-Labs/CP2102N-A02-GQFN24R?qs=u16ybLDytRaIVBf0X4zL0g%3D%3D
IC2: "Integrated Circuit", Manufacturer_Name=onsemi, Mouser Part Number=863-BC847BDW1T1G, Arrow Part Number=BC847BDW1T1G, Arrow Price/Stock=https://www.arrow.com/en/products/bc847bdw1t1g/on-semiconductor?region=nac, Datasheet Link=http://www.onsemi.com/pub/Collateral/BC846BDW1T1-D.PDF, Height=1.1mm, Manufacturer_Part_Number=BC847BDW1T1G, Mouser Price/Stock=https://www.mouser.co.uk/ProductDetail/onsemi/BC847BDW1T1G?qs=vNc2DXHODiJIIkxW3oEo4A%3D%3D
IC3: "Integrated Circuit", Manufacturer_Name="Espressif Systems", Mouser Part Number=356-ESP32-PICO-D4, Datasheet Link=http://www.espressif.com/sites/default/files/documentation/esp32-pico-d4_datasheet_en.pdf, Manufacturer_Part_Number=ESP32-PICO-D4, Mouser Price/Stock=https://www.mouser.co.uk/ProductDetail/Espressif-Systems/ESP32-PICO-D4?qs=MLItCLRbWsw7MJlbN3HfdA%3D%3D
IC4: "Integrated Circuit", Manufacturer_Name="Texas Instruments", Mouser Part Number=595-TPS54394RSAR, Arrow Part Number=TPS54394RSAR, Arrow Price/Stock=https://www.arrow.com/en/products/tps54394rsar/texas-instruments?region=nac, Datasheet Link=http://www.ti.com/lit/gpn/tps54394, Height=1mm, Manufacturer_Part_Number=TPS54394RSAR, Mouser Price/Stock=https://www.mouser.co.uk/ProductDetail/Texas-Instruments/TPS54394RSAR?qs=iIeLWXrA%252B1VlbymFcvQr%252BA%3D%3D
IC5: "Integrated Circuit", Arrow Part Number=MCP3008T-I/SL, Manufacturer_Name=Microchip, Mouser Part Number=579-MCP3008T-I/SL, Arrow Price/Stock=https://www.arrow.com/en/products/mcp3008t-isl/microchip-technology?region=nac, Datasheet Link=http://ww1.microchip.com/downloads/en/DeviceDoc/21295d.pdf, Height=1.75mm, Manufacturer_Part_Number=MCP3008T-I/SL, Mouser Price/Stock=https://www.mouser.co.uk/ProductDetail/Microchip-Technology-Atmel/MCP3008T-I-SL?qs=e4wS3D8CKP5diqjjsUuSnQ%3D%3D
IC6: "Integrated Circuit", Manufacturer_Name=Microchip, Mouser Part Number=998-MIC5219-3.3YM5TR, Arrow Part Number=MIC5219-3.3YM5-TR, Arrow Price/Stock=https://www.arrow.com/en/products/mic5219-3.3ym5-tr/microchip-technology?region=nac, Datasheet Link=http://www.microchip.com/mymicrochip/filehandler.aspx?ddocname=en579712, Height=1.45mm, Manufacturer_Part_Number=MIC5219-3.3YM5-TR, Mouser Price/Stock=https://www.mouser.co.uk/ProductDetail/Microchip-Technology-Atmel/MIC5219-3.3YM5-TR?qs=U6T8BxXiZAWojkIJMtSJlw%3D%3D
IC7 IC8 IC10: "Integrated Circuit", Arrow Part Number=MCP1407-E/MF, Manufacturer_Name=Microchip, Mouser Part Number=579-MCP1407-E/MF, Arrow Price/Stock=https://www.arrow.com/en/products/mcp1407-emf/microchip-technology?region=nac, Datasheet Link=http://ww1.microchip.com/downloads/en/devicedoc/20002019c.pdf, Height=1mm, Manufacturer_Part_Number=MCP1407-E/MF, Mouser Price/Stock=https://www.mouser.co.uk/ProductDetail/Microchip-Technology/MCP1407-E-MF?qs=usxtMOJb1RzDDcMp7foz0Q%3D%3D
IC9: "Integrated Circuit", Arrow Part Number=TJA1441ATK/0Z, Manufacturer_Name=PHILIPS, Mouser Part Number=771-TJA1441ATK/0Z, Arrow Price/Stock=https://www.arrow.com/en/products/tja1441atk0z/nxp-semiconductors?region=nac, Datasheet Link=https://www.nxp.com/docs/en/data-sheet/TJA1441.pdf, Height=1mm, Manufacturer_Part_Number=TJA1441ATK/0Z, Mouser Price/Stock=https://www.mouser.co.uk/ProductDetail/NXP-Semiconductors/TJA1441ATK-0Z?qs=eP2BKZSCXI5cxCGFixd76A%3D%3D
J1: "Connector", Manufacturer_Name="TE Connectivity", Mouser Part Number=571-2201778-1, Arrow Part Number=2201778-1, Arrow Price/Stock=https://www.arrow.com/en/products/2201778-1/te-connectivity?region=nac, Datasheet Link=https://www.te.com/commerce/DocumentDelivery/DDEController?Action=showdoc&DocId=Customer+Drawing%7F2201778%7FB%7Fpdf%7FJapanese%7FJPN_CD_2201778_B.pdf%7F2201778-1, Height=1.95mm, Manufacturer_Part_Number=2201778-1, Mouser Price/Stock=https://www.mouser.co.uk/ProductDetail/TE-Connectivity/2201778-1?qs=%2F6W%2F9%2FHWvcBMWWw9w8oBng%3D%3D
J2 J5 J6: "Connector", Manufacturer_Name=Molex, Mouser Part Number=538-10-08-1101, Datasheet Link=http://www.molex.com/pdm_docs/sd/010081021_sd.pdf, Height=15.11mm, Manufacturer_Part_Number=10-08-1101, Mouser Price/Stock=https://www.mouser.co.uk/ProductDetail/Molex/10-08-1101?qs=55YkL0i%2Fqd8W1zI7AotXcA%3D%3D
J3: "Connector", Manufacturer_Name=Molex, Mouser Part Number=538-10-08-1041, Datasheet Link=http://uk.rs-online.com/web/p/products/6701686, Height=15.11mm, Manufacturer_Part_Number=10-08-1041, Mouser Price/Stock=https://www.mouser.co.uk/ProductDetail/Molex/10-08-1041?qs=hSmm4fxMIuMpPBN2wXpxuA%3D%3D
J4: "Connector", Manufacturer_Name="TE Connectivity", Mouser Part Number=571-5747844-6, Arrow Part Number=5747844-6, Arrow Price/Stock=https://www.arrow.com/en/products/5747844-6/te-connectivity?region=europe, Datasheet Link=http://www.te.com/commerce/DocumentDelivery/DDEController?Action=showdoc&DocId=Customer+Drawing%7F5747844%7FP%7Fpdf%7FEnglish%7FENG_CD_5747844_P.pdf%7F5747844-6, Height=12mm, Manufacturer_Part_Number=5747844-6, Mouser Price/Stock=https://www.mouser.co.uk/ProductDetail/TE-Connectivity/5747844-6?qs=x6EjVpvqMVNBaI3EeeZZVw%3D%3D
L1 L2 L3 L4: library part Inductor, "Inductor", Code_IEC=1005, Code_JEITA=0402, LatestRevisionDate=29-May-2009, LatestRevisionNote="IPC-7351 Footprint Added.", PackageDescription="Chip Inductor", PackageReference=0402-A, Published=8-Jun-2000, Publisher="Altium Limited"
PRO-OB-1: "2.4GHz Bluetooth, WirelessHART, WLAN, Zigbeeâ„¢ Stamped Metal RF Antenna 2.4GHz ~ 2.5GHz Solder Surface Mount", Package=None, Availability=Unavailable, MP=PRO-OB-440, Price=None
Q1 Q2 Q3: "MOSFET (N-Channel)", Manufacturer_Name=Nexperia, Mouser Part Number=771-PMV15UNEAR, Arrow Part Number=PMV15UNEAR, Arrow Price/Stock=https://www.arrow.com/en/products/pmv15unear/nexperia?region=nac, Datasheet Link=https://assets.nexperia.com/documents/data-sheet/PMV15UNEA.pdf, Height=1.1mm, Manufacturer_Part_Number=PMV15UNEAR, Mouser Price/Stock=https://www.mouser.co.uk/ProductDetail/Nexperia/PMV15UNEAR?qs=Cb2nCFKsA8rBBa4eM1nPmg%3D%3D
R1 R2 R3 R4 R5 R6 R7 R8 R10 R11 R12 R13 R15 R16 R17 R18 R23 R24 R25 R26 R27 R28 R29 R30 R31 R32 R35 R36 R37 R38 R39 R40 R42 R43 R45 R46 R47 R48 R49 R51: library part Res1, "Resistor", LatestRevisionDate=17-Jul-2002, LatestRevisionNote="Re-released for DXP Platform.", PackageDescription="Axial Device, Thru-Hole; 2 Leads; 0.3 in Pin Spacing", PackageReference=AXIAL-0.3, Published=8-Jun-2000, Publisher="Altium Limited"
R9 R14 R19 R20 R21 R22 R33 R34 R41 R44 R50 R52 R53 R54 R55: "Resistor", LatestRevisionDate=17-Jul-2002, LatestRevisionNote="Re-released for DXP Platform.", PackageDescription="Axial Device, Thru-Hole; 2 Leads; 0.3 in Pin Spacing", PackageReference=AXIAL-0.3, Published=8-Jun-2000, Publisher="Altium Limited"
SV1 SV2 SV3 SV4: "Support Via - Through Hole for PCB Support"
USB1: "Conn Micro USB 2.0 Type B RCP 5 POS 0.65mm Solder RA SMD 5 Terminal 1 Port T/R", Package=None, Availability=Unavailable, Centerline_Pitch=".65 mm[.025 in]", MF="TE Connectivity", MP=2013499-1, Number_of_Positions=5, Price=None, Product_Type=Connector, SnapEDA_Link=https://www.snapeda.com/parts/2013499-1/TE%20Connectivity%20AMP%20Connectors/view-part/779144/?ref=snap, TE_purchase_URL=https://www.te.com/usa-en/product-2013499-1.html?te_bu=Cor&te_type=disp&te_campaign=seda_glo_cor-seda-global-disp-prtnr-fy19-seda-model-bom-cta_sma-317_1&elqCampaignId=32493

## Via types
v1: diameter 0.4, hole 0.2, Top Layer to Bottom Layer, tented both sides, 1061 vias
v2: diameter 0.7, hole 0.35, Top Layer to Bottom Layer, tented both sides, 146 vias

## Nets (pads, with @x,y where several pads share a name; then routed paths per layer and width w, separated by ;. In a path a pad name is that pad's centre, name@x,y a point inside that pad or via, vN(x,y) a via of type N, cw(c..) or ccw(c..) an arc to the next point about the centre after c; other vN are vias at no path point)
+3.3V: C1.1 C2.1 C3.1 C4.1 C10.1 C11.1 C12.1 C21.1 C34.2 C35.2 C37.2 C39.1 IC1.6 IC3.1 IC3.19 IC3.37 IC3.43 IC3.46 IC5.15 IC5.16 IC6.5 IC9.5 J1.4 L1.1 L4.2 R1.2 R2.2 R3.2 R4.2 R9.1 R10.2 R11.2 R12.2 R13.2 R19.1 R23.2 R25.2 R33.2 R34.2 R35.2 R37.1 R41.2 | length 274
  Top Layer w0.15: v2(43.26,33.45) 45.025,33.45 46.55,34.975 47.975,34.975 IC3.1@48,34.95 ; C11.1@43.26,35.6 44.15,35.6 45.15,36.6 IC3.46@47.35,36.6 ; v2(43.26,37.75) 43.485,37.525 46.175,37.525 46.75,38.1 IC3.43@47.35,38.1 ; v2(43.26,42.35) 46.975,42.35 47.35,41.975 IC3.37@47.35,41.1 ; IC3.19@54.15,38.6 55.3,38.6 56.275,37.625 57.475,37.625 57.863,38.013 58.453,38.013 v2(58.716,38.275)
  Top Layer w0.3: v2(20.106,48.917) 21.733,48.917 24.118,46.532 IC9.5@25.669,46.532 ; v2(37.35,52.8) R37.1@36.106,52.8 36.106,54.644 35.296,55.454 L4.2@35.296,57.782 35.452,57.782 40.63,62.96 v2(43,62.96) R12.2@46.05,62.96 R11.2@49.1,62.96 R10.2@52.15,62.96 R4.2@55.2,62.96 R3.2@58.25,62.96 R2.2@61.3,62.96 v2(64.35,62.96) ; v2(42.35,47.8) 42.35,47.825 45.375,50.85 52.725,50.85 54.58,48.995 IC5.15@54.58,46.9 IC5.16@55.85,46.9 ; v2(42.625,69.385) 43.09,69.85 IC6.5@44.35,69.85 ; v2(43.26,33.45) C11.1@43.26,35.6 v2(43.26,37.75) ; v2(48.575,77.851) 48.575,79.65 49.212,80.287 52.163,80.287 52.802,79.648 IC1.6@52.802,78.35 ; C3.1@49.95,27.29 C4.1@52.075,27.29 ; C4.1@52.075,27.3 52.085,27.29 C4.1@52.1,27.29 v2(52.1,29.44) ; v2(70.3,86.15) 70.313,86.137 70.313,84.563 J1.4@70.326,84.55
  Top Ground w0.3: v2(64.35,62.96) 64.35,82.375 68.125,86.15 v2(70.3,86.15)
  Bottom Ground w0.3: v2(43,62.96) 43,65.9 42.625,66.275 v2(42.625,69.385) 42.625,71.901 v2(48.575,77.851)
  Bottom Layer w0.3: v2(20.106,48.917) 21.839,50.65 39.5,50.65 ; R35.2@36.11,66.2 36.11,67.935 37.56,69.385 v2(42.625,69.385) ; v2(37.35,52.8) 39.5,50.65 ; v2@43.235,37.775 v2(43.26,37.75) v2(43.26,42.35) 43.26,46.89 v2(42.35,47.8) 39.5,50.65 ; v2(43.26,33.45) 47.27,29.44 v2(52.1,29.44) ; R41.2@43.86,19.75 43.86,19.525 45.385,18 49.26,18 ; R19.1@47.325,74.56 R9.1@47.325,77.913 47.387,77.851 v2(48.575,77.851) ; v2(54.25,29.44) v2(52.1,29.44) ; v2(58.716,38.275) C35.2@58.765,38.275 59.125,37.915 59.125,37.625 60.392,36.358 v2@61.832,36.358 ; v2(61.84,36.35) 63.46,34.73 v2(63.46,31.95) 63.46,23.625 59.76,19.925 R33.2@59.76,19.7 59.76,19.475 58.285,18 49.26,18 ; v2(70.3,86.15) 70.3,80.49 C37.2@70.59,80.2 ; 49.26,18 50.76,19.5 50.76,23.735 52.1,25.075 v2(52.1,29.44)
+5V: C32.2 C33.2 D1.1 IC1.7 IC6.1 IC6.3 IC9.3 J5.1 L3.1 R22.2 R38.2 R40.1 | length 121
  Top Layer w0.3: J5.1@9.85,56.55 10.025,56.375 14.125,56.375 15.613,57.863 v2(19.296,57.863) 18.486,57.053 R40.1@18.486,52.8 18.5,52.786 v2(18.5,51.275) ; IC9.3@28.569,45.882 31.018,45.882 31.85,45.05 34.469,45.05 v2(34.486,45.033) ; v2(36.15,69.875) 38.675,67.35 IC6.1@44.35,67.35 44.35,66.1 44.975,65.475 v2(46.3,65.475) 46.275,65.5 46.275,67.325 IC6.3@46.25,67.35 ; v2(50.275,79.533) 51.192,79.533 52.102,78.623 IC1.7@52.102,77.65
  Top Ground w0.3: v2(18.5,51.275) 19.388,50.387 19.702,50.387 29.133,50.387 v2(34.486,45.033)
  Bottom Ground w0.3: v2(36.15,69.875) 39.3,69.875 48.958,79.533 v2(50.275,79.533)
  Bottom Layer w0.254: D1.1@57.9,77.99 C32.2@60.85,77.99
  Bottom Layer w0.3: v2(19.296,57.863) 31.363,57.863 38.975,65.475 v2(46.3,65.475) ; R38.2@36.11,71.675 36.15,71.635 v2(36.15,69.875) ; v2(50.275,79.533) 53.242,79.533 54.785,77.99 D1.1@57.9,77.99
+12: F1.1 IC7.1 IC7.8 IC8.1 IC8.8 IC10.1 IC10.8 J3.1 Q1.3 Q2.3 Q3.3 | length 129
  Top Layer w0.3: J3.1@9.85,77.45 14.975,77.45 17.231,75.194 F1.1@17.231,71.789
  Top Layer w0.4: v2@24.438,21.981 IC10.8@24.438,22.895 ; v2@24.438,28.041 IC8.8@24.438,28.955 ; v2@24.438,34.101 IC7.8@24.438,35.015 ; IC10.1@30.038,22.895 30.043,22.89 30.043,21.976 v2(30.048,21.971) ; v2@30.043,28.036 IC8.1@30.043,28.95 ; v2@30.043,34.096 IC7.1@30.043,35.01
  Top Layer w0.8: v2(15.2,24.6) 15.21,24.61 Q3.3@18.196,24.61 ; v2@15.21,30.67 Q2.3@18.196,30.67 ; v2@15.21,36.73 Q1.3@18.196,36.73
  Top Ground w0.4: v2(15.2,24.6) 17.829,21.971 v2(30.048,21.971) ; v2(15.2,30.66) 17.8,28.06 v2@30.048,28.06 ; v2(15.2,36.72) 17.8,34.12 v2@29.997,34.12
  Top Ground w1.5: J3.1@9.85,77.45 15.2,72.1 v2(15.2,36.72) v2(15.2,30.66) v2(15.2,24.6)
  other v2: 24.443,21.976 24.443,28.036 30.048,28.031 24.443,34.096 30.048,34.091
+12_DIODE: C24.1 C25.1 D4.1 IC4.2 IC4.3 IC4.7 IC4.14 | length 32.3
  Top Layer w0.3: v2(23.692,59.778) 23.697,59.784 25.29,59.784 IC4.7@25.296,59.789 ; IC4.3@26.971,62.114 26.971,63.279 ; IC4.2@27.621,62.114 27.596,62.139 27.596,62.654 26.971,63.279 ; IC4.14@29.296,59.789 29.301,59.784 30.873,59.784 v2(30.878,59.778) ; D4.1@29.773,71.662 28.012,71.662 25.449,69.099 25.449,66.21 v2(25.439,66.2) 25.439,64.811 26.971,63.279
  Bottom Layer w0.3: v2(23.692,59.778) 28.003,59.778 ; v2(25.439,66.2) 25.439,62.386 28.025,59.8 28.003,59.778 ; v2(30.878,59.778) 28.003,59.778
CAN_H: IC9.7 J3.3 R45.1 | length 46.4
  Top Layer w0.15: v2(20.106,41.15) 22.5,41.15 23.25,41.9 23.25,44.3 24.182,45.232 IC9.7@25.669,45.232
  Bottom Layer w0.15: J3.3@9.85,67.45 7.15,64.75 7.15,45.7 9.025,43.825 13.875,43.825 16.55,41.15 v2(20.106,41.15)
CAN_L: IC9.6 J3.4 R46.2 | length 27.6
  Top Layer w0.15: v2(20.106,45.033) 22.833,45.033 23.682,45.882 IC9.6@25.669,45.882
  Bottom Layer w0.15: J3.4@9.85,62.45 15.15,57.15 15.15,51.675 20.106,46.719 v2(20.106,45.033)
CAN_RX: IC9.4 R48.1 | length 6.9
  Top Layer w0.15: IC9.4@28.569,46.532 29.732,46.532 32.117,48.917 R48.1@34.486,48.917
CAN_TX: IC9.1 R47.1 | length 7.3
  Top Layer w0.15: IC9.1@28.569,44.582 29.943,44.582 33.375,41.15 R47.1@34.486,41.15
CH0: C6.2 IC5.1 R5.1 | length 11.6
  Top Layer w0.15: IC5.1@55.85,52.3 63,52.3 64.35,53.65 v2(64.35,56.19)
CH1: C7.2 IC5.2 R6.1 | length 9
  Top Layer w0.15: IC5.2@54.58,52.3 54.58,53.405 55.45,54.275 59.16,54.275 61.075,56.19 v2(61.3,56.19)
CH2: C8.2 IC5.3 R7.1 | length 7.4
  Top Layer w0.15: IC5.3@53.31,52.3 53.31,53.71 54.55,54.95 56.785,54.95 58.025,56.19 v2(58.25,56.19)
CH3: C9.2 IC5.4 R8.1 | length 5.9
  Top Layer w0.15: IC5.4@52.04,52.3 52.04,54.24 53.99,56.19 v2(55.2,56.19)
CH4: C17.2 IC5.5 R15.1 | length 4.6
  Top Layer w0.15: IC5.5@50.77,52.3 50.77,55.035 51.925,56.19 v2(52.15,56.19)
CH5: C18.2 IC5.6 R16.1 | length 4.1
  Top Layer w0.15: v2(49.1,56.19) 49.5,55.79 IC5.6@49.5,52.3
CH6: C19.2 IC5.7 R17.1 | length 4.8
  Top Layer w0.15: v2(46.05,56.19) 46.05,55.475 48.23,53.295 IC5.7@48.23,52.3
CH7: C20.2 IC5.8 R18.1 | length 7.3
  Top Layer w0.15: v2(43,56.19) 42.975,56.165 42.975,54.3 43.45,53.825 46.4,53.825 46.96,53.265 IC5.8@46.96,52.3
CS: IC3.34 IC5.10 | length 12.4
  Top Layer w0.15: IC5.10@48.23,46.9 48.24,46.89 48.24,45.385 v2(48.25,45.375) ; IC3.34@49,41.75 49,42.6 v2(49.45,43.05)
  Bottom Layer w0.15: v2(48.25,45.375) 49.288,46.413 51.562,46.413 51.95,46.025 51.95,43.725 51.275,43.05 v2(49.45,43.05)
CS2: IC3.14 J1.2 | length 59.4
  Top Layer w0.15: IC3.14@54.15,36.1 55.075,36.1 v2(56.85,34.325) ; J1.2@68.126,84.55 68.175,84.501 v2(68.175,82.825)
  Top Ground w0.15: v2(56.85,34.325) 55.55,35.625 55.55,42.85 68.175,55.475 v2(68.175,82.825)
DTR: IC1.23 IC2.1 R20.2 | length 18
  Top Layer w0.15: IC2.1@54.602,69.55 54.602,69.535 54.727,69.41 v2(56.55,69.41) 59.96,69.41 61.075,70.525 61.075,75.9 59.825,77.15 IC1.23@56.002,77.15
EN: IC2.3 IC3.9 R41.1 RESET.2 | length 83.1
  Top Layer w0.15: v2(40.723,19.764) 40.723,19.914 44.834,24.025 52,24.025 53.15,25.175 53.15,31.675 52.775,32.05 52,32.825 IC3.9@52,34.95 ; v2(52.7,69.575) 53.277,69.575 IC2.3@53.302,69.55
  Bottom Ground w0.15: v2(40.723,19.764) 40.723,22.173 47.7,29.15 47.7,40.9 46.246,42.354 46.246,53.083 47.475,54.312 47.475,61.775 51.954,66.254 51.954,68.829 v2(52.7,69.575)
  Bottom Layer w0.15: v2(40.723,19.764) 42.226,19.764 R41.1@42.24,19.75
Extra_ADC: J5.9 R24.2 | length 38.3
  Top Layer w0.15: J5.9@9.85,16.55 13.775,20.475 33.05,20.475 34.525,21.95 34.525,29.325 35.75,30.55 R24.2@38.04,30.55
Extra_OUT: J5.7 Q3.2 R52.2 | length 13.2
  Top Layer w0.5: J5.7@9.85,26.55 17.05,26.55 17.986,25.614 19.026,25.614 19.08,25.56 v2(20.396,25.56)
  Bottom Layer w0.5: R52.2@18.555,26.525 19.431,26.525 v2(20.396,25.56)
Flow_Meter: J5.2 R26.2 | length 99.4
  Top Layer w0.15: v2(7.55,14.2) 7.55,49.25 J5.2@9.85,51.55 ; v2(33.482,15.193) 39.482,15.193 v2(39.5,15.175) ; v2(46.6,23.2) 46.625,23.225 52.55,23.225 53.95,24.625 57.725,24.625 58.34,25.24 R26.2@58.34,27.35
  Bottom Layer w0.15: v2@7.647,14.2 v2(7.55,14.2) 10.8,14.2 11.793,15.193 12.575,15.193 v2(33.482,15.193) ; v2(39.5,15.175) 39.5,21.2 41.5,23.2 v2(46.6,23.2)